# EAGLE board Forza R1 (EAGLE 9.6.2)
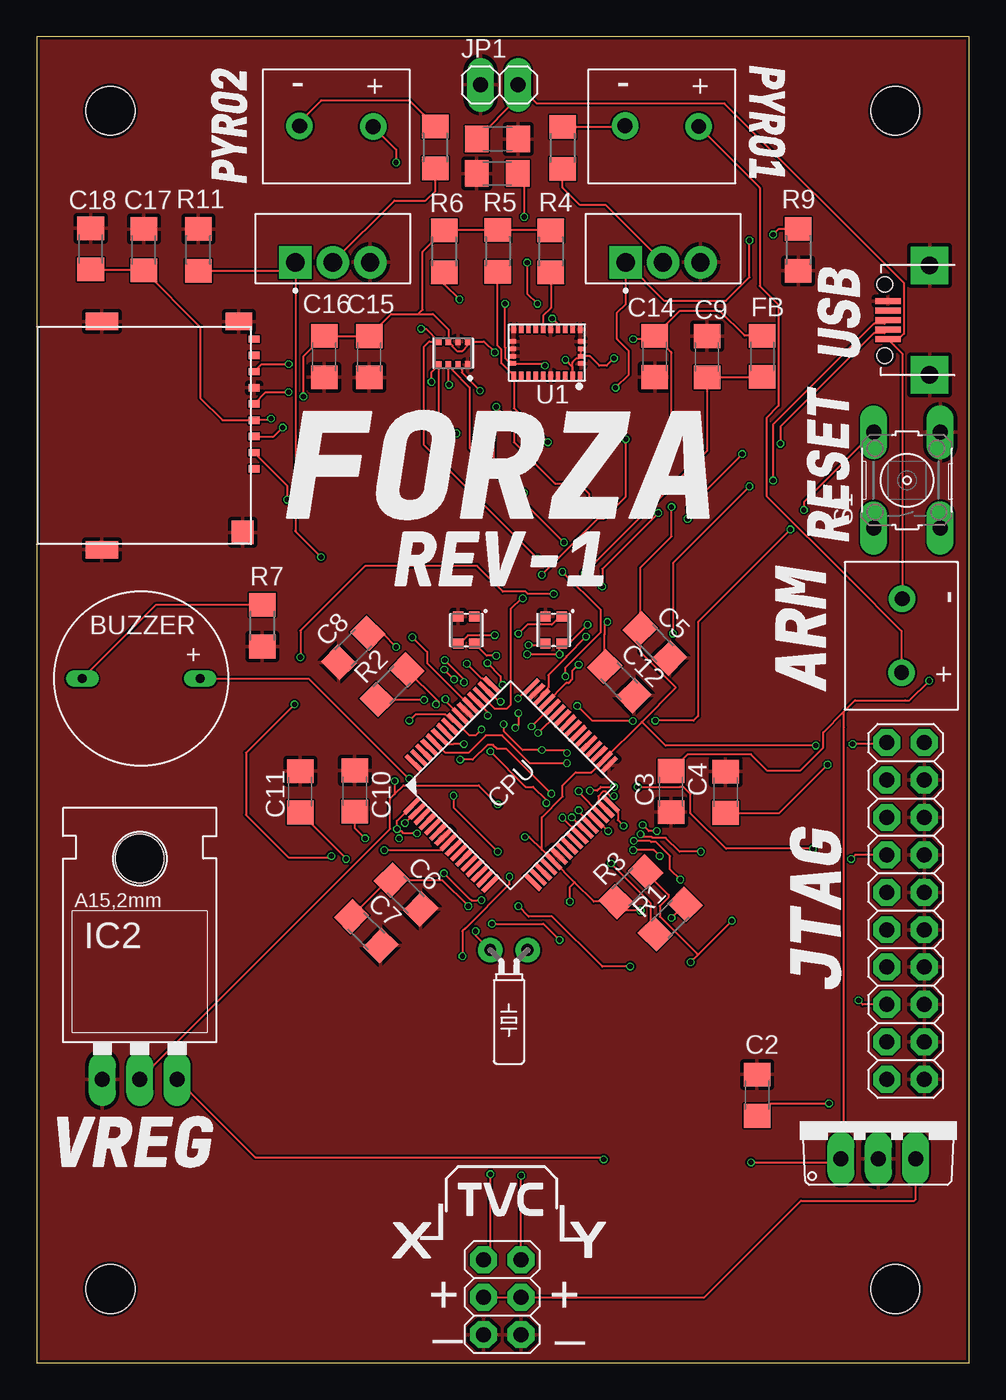
[diagram p0: board, top side]
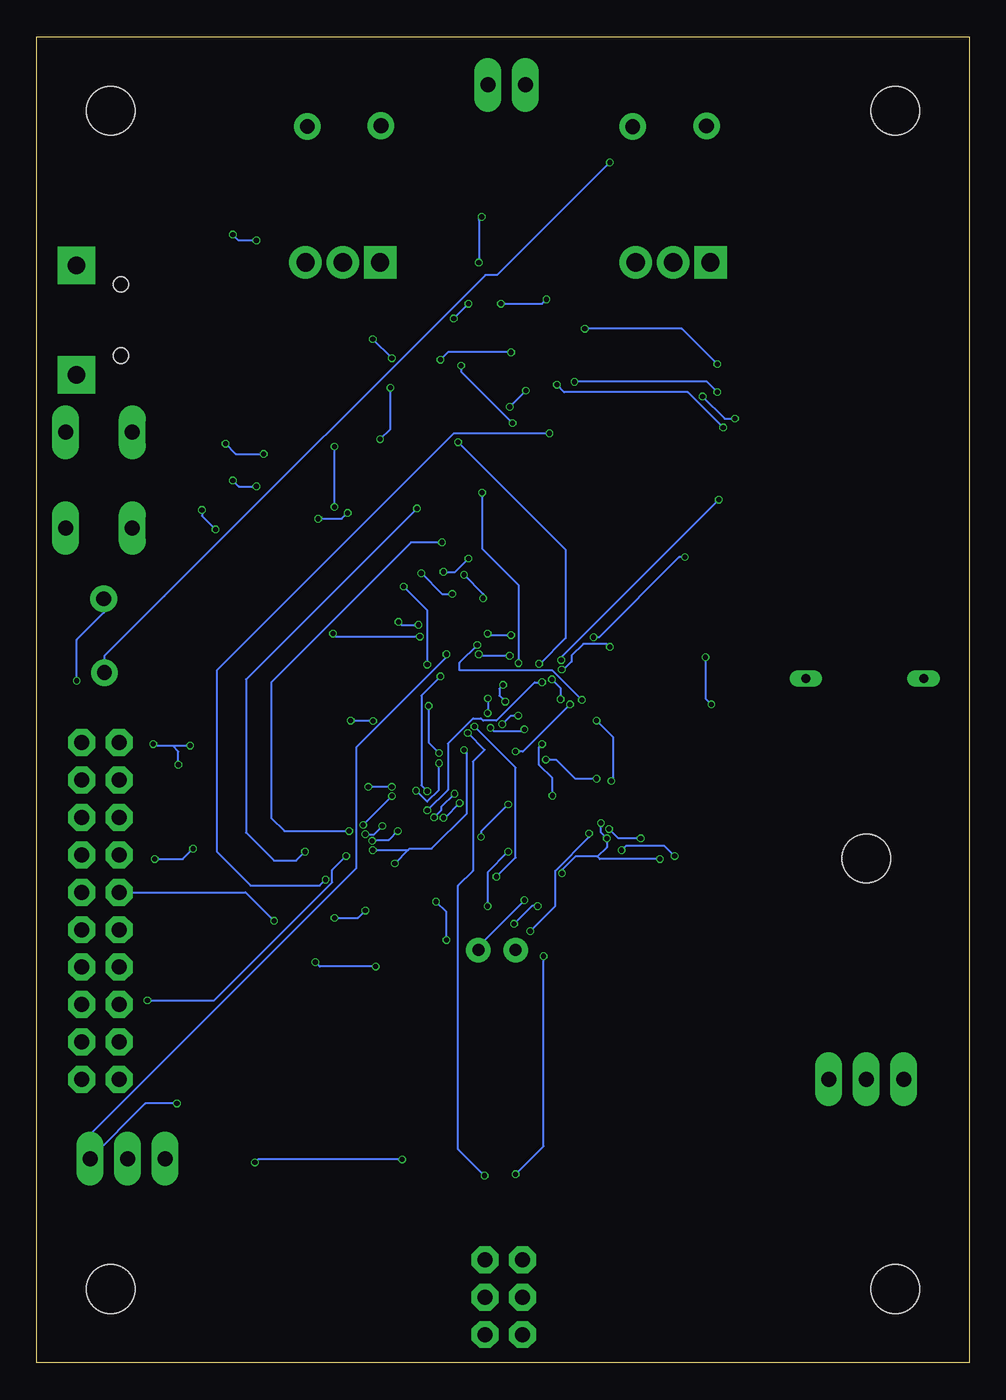
[diagram p1: board, bottom side, seen from below]

Size 63.31 x 90.03 mm. Coordinates in mm from the lower left corner, seen from the top.
Outline: 0,0 63.31,0 63.31,90.03 0,90.03 0,0
Copper layers (1*16): Top 0.035mm / dielectric 1.6mm / Bottom 0.035mm
Design rules "jlcpcb-2layers": minimum track width 5mil, minimum drill 0.3mm, track to track 5mil, track to pad 5mil, pad to pad 5mil, via to via 5mil, smd to smd 5mil, copper to edge 0.2mm, drill to drill 6mil, minimum pad ring 10mil, minimum via ring 3mil, stop-mask expansion 4mil, vias tented up to drill 0mil, thermal gap 10mil
Holes 3.3 mm at 5,5 58.3,5 5,85 58.3,85
tKeepout: area 0,80 to 10,90; area 53.3,80 to 63.3,90; area 0,0 to 10,10; area 53.3,0 to 63.3,10; area 0,80 to 10,90; area 53.3,80 to 63.3,90; area 53.3,0 to 63.3,10; area 0.1,0 to 10.1,10

## Footprints (pad centres in the part's own frame; a part is rotated, then mirrored left to right if it is on the bottom)
C1206 = smd 1.6 x 1.8: 1 -1.4,0; 2 1.4,0
WS2812-2020 = smd 0.7 x 0.7: DI -0.915,0.55; DO 0.915,-0.55; GND 0.915,0.55; VCC -0.915,-0.55
TO220V = drill 1.016 long: 1 -2.54,-2.54; 2 0,-2.54; 3 2.54,-2.54
TO220L1 = drill 1.016 long: 1 -2.54,-3.81; 2 0,-3.81; 3 2.54,-3.81 | hole 3.302: 0,11.176
1X02 = drill 1.016 long: 1 -1.27,0; 2 1.27,0
2X10 = drill 1.016 octagon: 1 -11.43,-1.27; 2 -11.43,1.27; 3 -8.89,-1.27; 4 -8.89,1.27; 5 -6.35,-1.27; 6 -6.35,1.27; 7 -3.81,-1.27; 8 -3.81,1.27; 9 -1.27,-1.27; 10 -1.27,1.27; 11 1.27,-1.27; 12 1.27,1.27; 13 3.81,-1.27; 14 3.81,1.27; 15 6.35,-1.27; 16 6.35,1.27; 17 8.89,-1.27; 18 8.89,1.27; 19 11.43,-1.27; 20 11.43,1.27
2X03 = drill 1.016 octagon: 1 -2.54,-1.27; 2 -2.54,1.27; 3 0,-1.27; 4 0,1.27; 5 2.54,-1.27; 6 2.54,1.27
TO254P1054X469X1930-3 = drill 1.23 pad 1.85 square: 1 -2.54,-0.94 | drill 1.23 pad 1.85: 2 0,-0.94; 3 2.54,-0.94
R1206 = smd 1.6 x 1.803: 1 -1.422,0; 2 1.422,0
B3F-10XX = drill 1.016 long: 1 -3.251,2.261; 2 3.251,2.261; 3 -3.251,-2.261; 4 3.251,-2.261
LGA28R50P4X10_380X520X100 = smd 0.3 x 0.525: 1 -2.25,1.562; 6 -2.25,-1.562; 7 -1.75,-1.562; 8 -1.25,-1.562; 9 -0.75,-1.562; 10 -0.25,-1.562; 11 0.25,-1.562; 12 0.75,-1.562; 13 1.25,-1.562; 14 1.75,-1.562; 15 2.25,-1.562; 20 2.25,1.562; 21 1.75,1.562; 22 1.25,1.562; 23 0.75,1.562; 24 0.25,1.562; 25 -0.25,1.562; 26 -0.75,1.562; 27 -1.25,1.562; 28 -1.75,1.562 | smd 0.425 x 0.3: 2 -2.312,0.75; 3 -2.312,0.25; 4 -2.312,-0.25; 5 -2.312,-0.75; 16 2.312,-0.75; 17 2.312,-0.25; 18 2.312,0.25; 19 2.312,0.75
XDCR_BMP280 = smd 0.5 x 0.35: 1 0.8,0.975; 2 0.8,0.325; 3 0.8,-0.325; 4 0.8,-0.975; 5 -0.8,-0.975; 6 -0.8,-0.325; 7 -0.8,0.325; 8 -0.8,0.975
SAMD21 = smd 0.3 x 1.5: GND 3.912,-10.687; GND3 6.412,0.693; PA08 1.412,-10.687; PA09 1.912,-10.687; PA10 2.412,-10.687; PA11 2.912,-10.687; PA12 7.412,-10.687; PA13 7.912,-10.687; PA14 8.412,-10.687; PA15 8.912,-10.687; PA27 7.912,0.693; PA28 6.912,0.693; PA30 4.912,0.693; PA31 4.412,0.693; PB00 2.912,0.693; PB01 2.412,0.693; PB02 1.912,0.693; PB03 1.412,0.693; PB10 4.412,-10.687; PB11 4.912,-10.687; PB12 5.412,-10.687; PB13 5.912,-10.687; PB14 6.412,-10.687; PB15 6.912,-10.687; PB22 8.912,0.693; PB23 8.412,0.693; PB30 3.912,0.693; PB31 3.412,0.693; RESET 7.412,0.693; VDDCORE 5.912,0.693; VDDIN 5.412,0.693; VDDIO 3.412,-10.687 | smd 1.5 x 0.3: GND1 10.673,-1.752; GND2 10.673,-8.752; GNDANA -0.687,-4.252; PA00 -0.687,-1.252; PA01 -0.687,-1.752; PA02 -0.687,-2.252; PA03 -0.687,-2.752; PA04 -0.687,-7.252; PA05 -0.687,-7.752; PA06 -0.687,-8.252; PA07 -0.687,-8.752; PA16 10.673,-7.752; PA17 10.673,-7.252; PA18 10.673,-6.752; PA19 10.673,-6.252; PA20 10.673,-4.752; PA21 10.673,-4.252; PA22 10.673,-3.752; PA23 10.673,-3.252; PA24 10.673,-2.752; PA25 10.673,-2.252; PB04 -0.687,-3.252; PB05 -0.687,-3.752; PB06 -0.687,-5.252; PB07 -0.687,-5.752; PB08 -0.687,-6.252; PB09 -0.687,-6.752; PB16 10.673,-5.752; PB17 10.673,-5.252; VDDANA -0.687,-4.752; VDDIO1 10.673,-1.252; VDDIO2 10.673,-8.252
BUZZER = drill 0.6 long: 3.3V 4,0; GND -4,0
MICRO-USB = smd 0.4 x 1.75: 1 -1.3,4.525; 2 -0.65,4.525; 3 0,4.525; 4 0.65,4.525; 5 1.3,4.525 | drill 1.2 pad 2.54 square: GND1 -3.725,1.7; GND2 3.725,1.7 | hole 1.05: -2.425,4.73; 2.425,4.73
SCREWTERMINAL = drill 1 pad 1.778: IN 3.8,2.5; OUT 3.85,7.5
MICROSD-PUSH-OUT = smd 0.5 x 0.75: 1 9.625,0.225; 2 8.525,0.225; 3 7.425,0.225; 4 6.325,0.225; 5 5.225,0.225; 6 4.125,0.225; 7 3.025,0.225; 8 1.925,0.225; CD 0.825,0.225 | smd 1.2 x 1.8: G1 -0.375,-0.8 | smd 1.2 x 2.2: G2 -0.375,-10.1; G4 15.125,-10.1 | smd 1.6 x 1.5: G3 13.95,-0.55
CRYSTAL-PTH-2X6-CYL = drill 0.813 pad 1.676: 1 -1.27,0; 2 1.27,0

## Placement (x,y rotation side)
C1  10uf  [C1206]  31.29,83.09 0 top
C2  1uf  [C1206]  48.91,18.16 90 top
C3  10uf  [C1206]  43.06,38.78 270 top
C4  10uf  [C1206]  46.77,38.73 90 top
C5  0.1uf  [C1206]  41.97,48.83 315 top
C6  0.1uf  [C1206]  25.07,31.78 315 top
C7  0.1uf  [C1206]  22.37,29.31 315 top
C8  0.1uf  [C1206]  21.49,48.54 45 top
C9  1uf  [C1206]  45.51,68.3 90 top
C10  15pf  [C1206]  21.59,38.81 270 top
C11  15pf  [C1206]  17.89,38.76 270 top
C12  1000uf  [C1206]  39.55,46.28 315 top
C13  0.1uf  [C1206]  31.27,80.74 0 top
C14  0.1uf  [C1206]  41.96,68.32 90 top
C15  100nF  [C1206]  22.57,68.3 270 top
C16  100nF  [C1206]  19.51,68.31 90 top
C17  0.1uf  [C1206]  7.26,75.57 90 top
C18  0.1uf  [C1206]  3.66,75.62 90 top
D1  WS2812_2020  [WS2812-2020]  35.09,49.75 90 top
D2  WS2812_2020  [WS2812-2020]  29.17,49.74 90 top
FB  30 Ohm  [C1206]  49.27,68.33 270 top
IC1  7805TV  [TO220V]  57.15,16.39 0 top
IC2  LD117AV  [TO220L1]  6.99,23.05 0 top
JP1  [1X02]  31.41,86.77 0 top
JP2  [2X10]  59,30.67 270 top
JP3  [2X03]  31.6,4.45 270 top
Q5  IRLZ44N  [TO254P1054X469X1930-3]  42.53,75.65 0 top
Q6  IRLZ44N  [TO254P1054X469X1930-3]  20.1,75.65 0 top
R1  10K  [R1206]  43.01,30.12 45 top
R2  470Ohm  [R1206]  24.12,46.04 45 top
R3  1K  [R1206]  40.34,32.32 45 top
R4  10K  [R1206]  34.91,75.46 90 top
R5  10K  [R1206]  31.31,75.48 90 top
R6  10K  [R1206]  27.66,75.46 90 top
R7  100Ohm  [R1206]  15.31,50.05 90 top
R8  1Ohm  [R1206]  35.71,82.49 90 top
R9  470Ohm  [R1206]  51.71,75.56 90 top
R10  1Ohm  [R1206]  27.06,82.52 90 top
R11  470Ohm  [R1206]  10.97,75.55 270 top
S1  [B3F-10XX]  59.09,59.92 90 top
U1  BNO055  [LGA28R50P4X10_380X520X100]  34.64,68.59 180 top
U2  BMP280  [XDCR_BMP280]  28.27,68.54 270 top
U$1  ATSAMD2164TQFP  [SAMD21]  25.11,39.21 45 top
U$2  BUZZER  [BUZZER]  7.09,46.45 0 top
U$3  MICRO-USB  [MICRO-USB]  62.33,70.79 90 top
U$4  SCREWTERMINAL  [SCREWTERMINAL]  37.44,87.79 270 top
U$5  SCREWTERMINAL  [SCREWTERMINAL]  15.34,87.78 270 top
U$7  MICROSD-PUSH-OUT  [MICROSD-PUSH-OUT]  14.52,70.32 270 top
U$8  SCREWTERMINAL  [SCREWTERMINAL]  62.57,54.36 180 top
Y1  32.768kHz  [CRYSTAL-PTH-2X6-CYL]  32.06,28.02 180 top

## Library data of the parts
C1-C18 FB = rcl; SPICEPREFIX: C
D1 D2 = SparkFun-LED; PROD_ID: DIO-15591
IC1 = linear
IC2 = v-reg
JP1-JP3 = pinhead
Q5 Q6 = IRLZ44N; AVAILABILITY: Not in stock; DESCRIPTION: N-Channel 55 V 47A (Tc) 3.8W (Ta), 110W (Tc) Surface Mount D2PAK; MF: Infineon / IR; MP: IRLZ44N; PACKAGE: TO-220-3 Infineon / IR; PRICE: None
R1-R11 = rcl; SPICEPREFIX: R
S1 = switch-omron; MPN: B3F-1000; OC_FARNELL: 176432; OC_NEWARK: 36M3542
U1 = BNO055; AVAILABILITY: In Stock; DESCRIPTION: BNO055 series Accelerometer, Gyroscope, Magnetometer, 3 Axis Sensor Evaluation Board; MF: Bosch; MP: BNO055; PACKAGE: LGA-28 Bosch; PRICE: None; PURCHASE-URL: https://pricing.snapeda.com/search/part/BNO055/?ref=eda
U2 = SBMP280; AVAILABILITY: Not in stock; DESCRIPTION: Pressure Sensor 4.35PSI ~ 15.95PSI (30kPa ~ 110kPa) Absolute - 16b 8-SMD; MF: Bosch; MP: BMP280; PACKAGE: SMD-8 Bosch Sensortec; PRICE: None
U$1 = Atmel ATSAMD21
U$2 = buzzer
U$3 = MicroUSB
U$4 U$5 U$8 = screw terminal
U$7 = cmsd2
Y1 = SparkFun-Clocks; PROD_ID: XTAL-10112

## Nets
3.3V: C4.1 C5.1 C6.1 C7.1 C14.2 C15.1 C16.2 C17.1 C18.1 FB.1 IC2.2 JP2.1 R1.2 R3.1 R4.2 R5.2 R6.2 U1.3 U1.4 U1.28 U2.6 U2.8 U$1.VDDIN U$1.VDDIO U$1.VDDIO1 U$1.VDDIO2 U$7.4
5V: C2.1 C12.1 D1.VCC D2.VCC IC1.3 JP3.3 JP3.4
7.4V: C1.1 C3.1 IC1.1 IC2.3 JP1.2 U$3.1 U$8.IN
7.4VPS: U$4.OUT U$5.OUT U$8.OUT
CS: U2.2 U$1.PA15
CSCARD: U$1.PB15 U$7.2
DM: U$1.PA24 U$3.2
DP: U$1.PA25 U$3.3
GND: C1.2 C2.2 C3.2 C4.2 C5.2 C6.2 C7.2 C8.1 C9.2 C10.1 C11.1 C12.2 C13.1 C14.1 C15.2 C16.1 C17.2 C18.2 D1.GND D2.GND IC1.2 IC2.1 JP1.1 JP2.4 JP2.6 JP2.8 JP2.10 JP2.12 JP2.14 JP2.16 JP2.18 JP2.20 JP3.5 JP3.6 Q5.3 Q6.3 R7.1 R9.1 R11.1 S1.4 U1.2 U1.5 U1.6 U1.10 U1.15 U1.16 U1.17 U1.18 U1.25 U2.1 U2.7 U$1.GND U$1.GND1 U$1.GND2 U$1.GND3 U$1.GNDANA U$3.5 U$3.GND1 U$3.GND2 U$7.6 U$7.G1 U$7.G2 U$7.G3 U$7.G4
LEDIN: R2.2 U$1.PB13
MISO: U2.5 U$1.PA13 U$7.7
MOSI: U2.3 U$1.PA14 U$7.3
N$1: C8.2 U$1.VDDCORE
N$5: C9.1 FB.2 U$1.VDDANA
N$7: D1.DO D2.DI
N$8: C11.2 U$1.PA01 Y1.1
N$9: C10.2 U$1.PA00 Y1.2
N$10: U$1.PB14 U$2.3.3V
N$11: D1.DI R2.1
N$12: R7.2 U$2.GND
N$13: R8.2 U$4.IN
N$14: Q5.2 R8.1
N$17: R10.2 U$5.IN
N$18: Q6.2 R10.1
N$19: C13.2 U1.9
N$25: R4.1 U1.11
PY1: Q5.1 R9.2 U$1.PA27
PY2: Q6.1 R11.2 U$1.PA28
RESET: JP2.15 R1.1 S1.2 U$1.RESET
SCK: U2.4 U$1.PA12 U$7.5
SCL: R6.1 U1.19 U$1.PB23
SDA: R5.1 U1.20 U$1.PB22
SWCLK: JP2.9 R3.2 U$1.PB30
SWDIO: JP2.7 U$1.PB31
TVCX: JP3.1 U$1.PA23
TVCY: JP3.2 U$1.PA22

## Tracks (layer width: path | path; a pad name or v marks a point on that pad's centre or on a via)
3.3V  (via drill 0.35)
  Top 0.127: 43.06,56.06 43.1,56.1 v43.1,58.1 | v43.1,62.2 43.1,68.58 43.06,68.62
  Top 0.152: 34.3,34.84 U$1.VDDIO 36.52,32.62 | 34.3,34.84 34.3,37.03 35.7,38.43 35.7,39.2 36.58,40.08 37.65,40.08 U$1.VDDIO2 41.09,43.52 | IC2.2 24,36.25 24,38.3 24.3,38.6 | 24.3,38.6 24.9,39.2 30,39.2 v31.3,37.9 | v31.1,68.6 30.36,69.34 U2.8 29.25,69.05 28.9,68.7 28.52,68.7 28.22,69.01 28.22,69.07 U2.6 27.95,70.16 26.9,71.2 25.9,71.2 | v35.9,68.1 36.39,67.61 U1.28 36.39,67.93 36.66,68.19 36.81,68.19 U1.3 | U1.3 U1.4 | C14.2 41.74,69.5 v40.5,69.5 | v39.2,68.2 38.7,67.7 38.2,67.7 37.56,68.34 U1.3 | v18.1,65.6 18.1,68.3 C16.2 C15.1 24.07,71.2 25.9,71.2 | v15.9,64.1 15.79,63.99 U$7.4 12.61,63.99 11.1,65.5 11.1,70.33 C17.1 7.21,74.22 C18.1 | R5.2 31.29,76.88 | 31.29,76.88 R6.2 26.2,75.42 26.2,71.5 25.9,71.2 | R4.2 31.29,76.88 | 41.09,43.52 43.4,45.83 40.98,48.25 C5.1 40.98,53.98 43.06,56.06 | JP2.1 57.63,42 v55.4,42 | v52.9,41.9 42.7,41.9 41.09,43.52 | C4.1 50.43,37.33 v53.7,40.6 | 36.52,32.62 37.82,31.32 R3.1 39.95,30.7 v41,30.7 | R1.2 v43.09,30.2 v43.1,30.2 | C7.1 23.85,32.77 C6.1 27.52,32.77 v29.3,31 | v30.9,29.8 34.4,29.8 v35.5,28.7 | v36.2,31.3 36.2,32.3 36.52,32.62 | 43.06,68.62 C14.2 | FB.1 48.07,69.73 46.4,71.4 43.64,71.4 C14.2 | v24.3,39.5 24.3,38.6 | v30.2,43 29.8,42.6 29.37,42.6 U$1.VDDIN 28.24,43.52 27.75,44.01 25.71,44.01 v25.3,43.6 | v33.15,35.7 33.44,35.7 34.3,34.84 | v32.7,44.11 32.7,43.3 v32.5,43.1 | U$1.VDDIO1 33.45,45.87 v32.68,45.1
  Bottom 0.127: v43.1,58.1 v43.1,62.2
  Bottom 0.152: v31.1,68.6 35.4,68.6 v35.9,68.1 | v40.5,69.5 v39.2,68.2 | v18.1,65.6 16.6,64.1 v15.9,64.1 | v55.4,42 55.3,41.9 54.1,41.9 | 54.1,41.9 v52.9,41.9 | v53.7,40.6 53.7,41.5 54.1,41.9 | v43.1,30.2 41.5,30.2 v41,30.7 | v29.3,31 29.7,31 v30.9,29.8 | v35.5,28.7 35.5,30.6 v36.2,31.3 | v24.3,39.5 24.2,39.6 24.2,42.5 v25.3,43.6 | v30.2,43 30.3,42.9 32.3,42.9 v32.5,43.1 | v31.3,37.9 33.15,36.05 v33.15,35.7 | v32.68,45.1 32.68,44.13 v32.7,44.11
5V  (via drill 0.35)
  Top 0.152: JP3.3 JP3.4 45.35,4.45 51.9,11 59.6,11 59.69,11.09 IC1.3 | C2.1 49.75,17.6 v53.8,17.6 | v33.3,48.1 v35.5,48.1 35.5,48.69 D1.VCC 36.13,48.83 v37.4,50.1 | v31.2,48 30.54,48 D2.VCC | C12.1 38.55,49.46 38.58,49.48 38.58,50.12 v38.75,50.3
  Bottom 0.152: v53.8,17.6 55.94,17.6 IC1.3 59.69,15.51 41.6,33.6 41.6,41.8 35.5,47.9 v35.5,48.1 | v33.3,48.1 33.2,48 v31.2,48 | v38.75,50.3 38.55,50.1 v37.4,50.1
7.4V  (via drill 0.35)
  Top 0.127: 58.97,44.97 55.56,44.97 54.81,44.21 | 54.81,44.21 53.4,42.8 53.4,41.76 | 54.81,43.13 54.81,44.21 | U$8.IN 58.77,68.53 58.2,69.1 | v38.5,13.8 38.37,13.94 14.84,13.94 IC2.3 | v48.5,13.6 54.36,13.6 IC1.1
  Top 0.152: 54.81,43.13 54.81,14.05 IC1.1 | C1.1 32.68,85.88 JP1.2 33.95,85.5 46.7,85.5 58.88,73.32 58.88,69.86 58.52,69.49 U$3.1 58.2,69.1 | 53.4,41.76 51.82,40.18 49.62,40.18 48.5,41.3 44.19,41.3 C3.1 | 58.97,44.97 59.27,44.97 v60.6,46.3
  Bottom 0.127: v38.5,13.8 48.3,13.8 v48.5,13.6
  Bottom 0.152: v60.6,46.3 60.6,49.1 58.77,50.93 U$8.IN
7.4VPS  (via drill 0.35)
  Top 0.127: 55.2,53.2 58.72,49.68 U$8.OUT
  Top 0.152: U$5.OUT 24.4,82.37 v24.4,81.5 | U$4.OUT 49.1,79.78 49.1,73.1 50.37,71.83 50.37,64.97 49.55,64.15 49.55,58.85 55.2,53.2
  Bottom 0.127: 54.66,52.04 58.72,47.98 U$8.OUT
  Bottom 0.152: v24.4,81.5 32.05,73.85 32.85,73.85 54.66,52.04
CS  (via drill 0.35)
  Top 0.127: 28.87,67.41 28.87,67.23 v30.1,66 | v31.2,64.9 32.4,63.7 32.4,62.5 35.2,59.7 36.8,59.7 37.5,59 37.5,58.77
  Top 0.152: U2.2 28.87,67.47 28.87,67.41 | 37.5,58.77 v37.5,58 | v45.1,34.7 43.64,34.7 42.7,35.65 41.81,35.65 41.74,35.71 41.17,35.71 v41,35.88 | v39.84,36.45 39.45,36.84 39.45,37.47 U$1.PA15
  Bottom 0.127: v30.1,66 v31.2,64.9
  Bottom 0.152: v37.5,58 49.1,46.4 49.1,36 47.2,34.1 45.7,34.1 v45.1,34.7 | v41,35.88 40.41,35.88 v39.84,36.45
CSCARD  (via drill 0.35)
  Top 0.152: U$7.2 17,59.54 v17,58.6 | v27.7,47.7 29,46.4 v29,46.2 | U$1.PB15 37.55,36.65 36.8,37.4 v36.8,37.5
  Bottom 0.152: v17,58.6 27.7,47.9 v27.7,47.7 | v29,46.2 29.5,46.2 32.1,43.6 33,43.6 33.15,43.75 33.69,43.75 35.4,42.04 35.4,38.9 v36.8,37.5
DM  (via drill 0.35)
  Top 0.152: U$3.2 57.56,69.89 56.85,69.89 50.5,63.55 v50.5,62.4 | v47.9,61.7 44.2,58 v44.2,57.3 | v42.2,57.7 38.4,53.9 v38.4,52.7 | v36.8,47.4 36.35,46.95 36.35,46.41 36.09,46.15 35.94,46.15 U$1.PA24
  Bottom 0.152: v50.5,62.4 49.8,61.7 v47.9,61.7 | v44.2,57.3 42.6,57.3 v42.2,57.7 | v38.4,52.7 36.8,51.1 v36.8,47.4
DP  (via drill 0.35)
  Top 0.152: U$3.3 57.56,70.54 56.85,70.54 50,63.7 v50,59.9 | v48.4,59.5 43.2,54.3 v43.2,49.5 | v37.3,49.3 35.95,47.95 35.95,47.91 34.73,46.69 34.73,45.85 34.25,45.37 U$1.PA25
  Bottom 0.152: v50,59.9 49.6,59.5 v48.4,59.5 | v43.2,49.5 43,49.3 v37.3,49.3
GND
  pour Top: -2.8,90.5 -2.8,-2.4 67.6,-2.4 67.6,91.2 -2.1,91.2
LEDIN  (via drill 0.35)
  Top 0.152: R2.2 27.28,44.88 v27.1,44.7 | v30.8,41.5 33.2,39.1 33.7,39.1 34.6,38.2 v34.6,38 | v35.7,37 36.84,35.86 U$1.PB13
  Bottom 0.152: v27.1,44.7 30.3,41.5 v30.8,41.5 | v35.7,37 35.6,37 v34.6,38
MISO  (via drill 0.35)
  Top 0.152: U$7.7 15.25,67.8 v17.11,67.8 | v26.1,70.2 26.43,70.2 U2.5 26.64,69.34 26.3,69 26.3,62.3 v34,54.6 | U$1.PA13 36.8,38.7 v36.8,38.8 | v35.9,46.6 35.9,47.2 38.3,49.6 38.3,51.1 v35.7,53.7
  Bottom 0.152: v17.11,67.8 19.51,70.2 v26.1,70.2 | v36.8,38.8 37.2,39.2 37.2,45.3 v35.9,46.6 | v35.7,53.7 34.9,53.7 v34,54.6
MOSI  (via drill 0.35)
  Top 0.152: U$7.3 16.09,62.9 v16.7,63.5 | v28,66.4 27.95,66.45 U2.3 28.22,67.47 28.22,67.41 29.4,66.22 29.4,62.1 v35.8,55.7 | v42.1,36.1 41.56,36.1 v41.15,36.51 | v39.19,38.47 38.95,38.47 38.63,38.79 38.46,38.79 38.13,38.46 38.13,38.08 U$1.PA14
  Bottom 0.152: v16.7,63.5 19.1,65.9 27.5,65.9 v28,66.4 | v35.8,55.7 37.9,55.7 47.4,46.2 47.4,37 46.5,36.1 v42.1,36.1 | v41.15,36.51 v39.19,38.46 v39.19,38.47
N$1  (via drill 0.35)
  Top 0.152: C8.2 23.47,49.53 v24.4,48.6 | v27.67,47.07 v28.34,46.4 | v27.75,45.05 27.75,44.93 U$1.VDDCORE
  Bottom 0.152: v24.4,48.6 24.6,48.8 26.2,48.8 27,48 27,47.6 27.53,47.07 v27.67,47.07 | v28.34,46.4 27.75,45.8 v27.75,45.05
N$5  (via drill 0.35)
  Top 0.152: FB.2 49.24,66.9 C9.1 45.51,61.91 v37.2,53.6 | v35.1,52.2 33.34,52.2 33.19,52.35 31.65,52.35 29.9,54.1 22.3,54.1 17.9,49.7 v17.9,47.9 | v17.5,44.7 14.2,41.4 14.2,37.2 17.1,34.3 19.9,34.3 v20,34.4 | v23.6,34.8 27.42,34.8 U$1.VDDANA
  Bottom 0.152: v37.2,53.6 35.8,52.2 v35.1,52.2 | v17.9,47.9 17.9,45.1 v17.5,44.7 | v20,34.4 20.7,35.1 23.3,35.1 v23.6,34.8
N$7  (via drill 0.35)
  Top 0.152: D1.DO 35.53,50.66 34.98,50.11 33.31,50.11 v32.7,49.5 | D2.DI 28.73,48.83 29.28,49.38 31.08,49.38 v31.1,49.4
  Bottom 0.152: v32.7,49.5 32.6,49.4 v31.1,49.4
N$8  (via drill 0.35)
  Top 0.127: v27.65,33.23 29.43,31.44 29.48,31.44 29.52,31.4 v30.2,31.4
  Top 0.152: C11.2 21,34.25 v21,34.2 | U$1.PA01 25.84,37.48 v25,36.64
  Bottom 0.127: v24.6,35.6 24.6,35 25.24,34.36 26.74,34.36 27.65,33.45 v27.65,33.23 | v30.2,31.4 33.33,28.27 Y1.1
  Bottom 0.152: v21,34.2 25.08,34.2 25.24,34.36 | v24.6,35.6 25,36 v25,36.64
N$9  (via drill 0.35)
  Top 0.127: Y1.2 29.8,29.01 v29.8,29.3
  Top 0.152: C10.2 21.59,36.31 v22.3,35.6 | U$1.PA00 24.45,36.78 v24.45,36.23 24.63,36.05 24.79,36.05 24.91,35.94 v25.81,35.94
  Bottom 0.127: v29.8,29.3 28.1,31 28.1,33.4 25.81,35.69 v25.81,35.94
  Bottom 0.152: v22.3,35.6 23.82,35.6 v24.45,36.23
N$10  (via drill 0.35)
  Top 0.152: U$2.3.3V 18.45,46.45 25.3,39.6 v25.3,39.65 | v34.95,38.63 31.88,41.7 31.24,41.7 30.99,41.95 30.61,41.95 29.6,40.95 v28.75,40.95 | v36.33,37.03 37.17,36.18 U$1.PB14
  Bottom 0.152: v34.95,38.63 35.85,37.73 35.85,37.51 v36.33,37.03 | v28.75,40.95 28.05,40.95 26.75,39.65 v25.3,39.65
N$11  (via drill 0.35)
  Top 0.152: R2.1 26.27,45.03 v26.3,45 | v33.4,48.73 34.44,48.73 D1.DI
  Bottom 0.152: v26.3,45 28.3,47 34.6,47 34.6,47.53 v33.4,48.73
N$12
  Top 0.152: U$2.GND 8.11,51.47 R7.2
N$13
  Top 0.152: R8.2 39.86,83.91 U$4.IN
N$14
  Top 0.152: Q5.2 38.64,78.6 36.9,78.6 35.71,79.79 R8.1
N$17
  Top 0.152: R10.2 25.3,85.7 19.3,85.7 17.84,84.24 U$5.IN
N$18
  Top 0.152: Q6.2 24.29,78.9 26.4,78.9 27.06,79.56 R10.1
N$19  (via drill 0.35)
  Top 0.152: C13.2 33.1,80.31 v33.1,77.8 | v33.3,74.7 33.3,72.6 v34,71.9 | v35,70.9 35.39,70.51 U1.9
  Bottom 0.152: v33.1,77.8 33.3,77.6 v33.3,74.7 | v34,71.9 v35,70.9
N$25
  Top 0.152: R4.1 34.91,71.61 34.39,71.09 U1.11
PY1  (via drill 0.35)
  Top 0.127: v39.3,66.2 40.2,67.1 40.2,68.7 39.4,69.5 39.4,71.3 39.99,71.89 Q5.1 | 32.2,51.2 32.9,51.9 v33,51.9 | v34.3,53.5 38.1,57.3 38.5,57.3 40,58.8 v40,62.7
  Top 0.152: Q5.1 42.6,72.1 46.8,72.1 48.4,73.7 v48.4,76.2 | v50,76.6 50.38,76.98 R9.2 | U$1.PA27 31.1,44.4 31.9,44.4 32.2,44.7 32.2,51.2
  Bottom 0.127: v40,62.7 39.3,63.4 v39.3,66.2 | v33,51.9 33,52.2 v34.3,53.5
  Bottom 0.152: v48.4,76.2 49.6,76.2 v50,76.6
PY2  (via drill 0.35)
  Top 0.127: 17.56,56.53 17.56,56.44 v19.3,54.7 | v25.5,49.25 26.5,48.25 26.5,47.5 29.41,44.59 U$1.PA28
  Top 0.152: R11.2 16.98,74.13 Q6.1 17.56,56.53
  Bottom 0.127: v19.3,54.7 19.7,54.7 25.15,49.25 v25.5,49.25
RESET  (via drill 0.35)
  Top 0.152: JP2.15 56.08,24.32 v55.8,24.6 | v52.1,57.9 52.1,58.44 S1.2 | v51.18,56.58 44.9,50.3 44.9,43.9 44.6,43.6 v42,43.6 | v40.47,43.57 37.73,43.57 v36.7,44.6 | v42.3,34.4 41.9,34.8 v40.5,34.8 | v39,33.9 41.7,31.2 41.7,29.42 R1.1 | v36,41.4 35.8,41.6 v34.3,41.6 32.99,41.6 31.7,42.89 v31.7,43.35 | U$1.RESET 30.62,44.18 v30.62,43.94
  Bottom 0.152: v42.3,34.4 43.25,33.45 43.25,32.61 51.26,24.6 v55.8,24.6 | v40.5,34.8 38.1,34.8 | v34.3,41.6 34.1,41.4 34.1,37.3 36.5,34.9 38,34.9 38.1,34.8 | v52.1,57.9 52.1,57.5 v51.18,56.58 | v42,43.6 40.5,43.6 v40.47,43.57 | v36.7,44.6 36.7,42.1 v36,41.4 | v39,33.9 38.1,34.8 | v31.7,43.35 31.12,43.94 v30.62,43.94
SCK  (via drill 0.35)
  Top 0.152: U$7.5 15.55,65.9 v17.1,65.9 | v26.8,66.6 26.8,67.25 U2.4 27.3,64.31 v28.5,63.1 | v43.7,32.8 43,33.5 43,34.4 42.05,35.35 41.71,35.35 41.63,35.43 v40.54,35.43 | v38.8,36.1 38.01,36.89 U$1.PA12
  Bottom 0.152: v17.1,65.9 17.8,66.6 v26.8,66.6 | v28.5,63.1 35,63.1 51.1,47 51.1,34.7 48.8,32.4 44.1,32.4 v43.7,32.8 | v40.54,35.43 40.47,35.5 39.4,35.5 v38.8,36.1
SCL  (via drill 0.35)
  Top 0.152: v31.8,71.9 31.8,68.94 31.83,68.9 31.83,68.18 32.03,67.99 32.18,67.99 U1.19 34.36,67.84 v34.5,67.7 | v28.7,72.2 27.66,73.24 R6.1 | v31,63.8 31,61.14 v33.07,59.07 | v30.6,47.5 31.5,46.6 31.5,46.1 31.58,46.02 v31.64,46.02 | U$1.PB23 30.64,45.65 31.4,44.88 v31.5,44.88
  Bottom 0.152: v31.8,71.9 29,71.9 v28.7,72.2 | v34.5,67.7 34.5,67.3 v31,63.8 | v33.07,59.07 33.07,55.27 30.6,52.8 v30.6,47.5 | v31.64,46.02 31.9,45.77 31.9,45.3 31.5,44.9 v31.5,44.88
SDA  (via drill 0.35)
  Top 0.152: R5.1 31.3,74.05 31.3,69.04 31.55,68.79 31.55,67.86 U1.20 32.39,64.81 v34.7,62.5 | v29.2,47.45 30.17,46.48 30.23,46.48 30.71,46 U$1.PB22
  Bottom 0.152: v34.7,62.5 27.4,55.2 27.4,49.2 29.15,47.45 v29.2,47.45
SWCLK  (via drill 0.35)
  Top 0.152: v28.3,38.5 28.3,37.7 v31.3,34.7 | v29,42 28.27,42 28.25,41.98 27.87,41.98 U$1.PB30 | v47.2,30 44.85,27.65 | 44.85,27.65 v44.4,27.2 | R3.2 42.9,31.77 42.9,31.6 42.3,31 42.3,30.3 44.85,27.75 44.85,27.65 | v32.7,31 33.4,30.3 35,30.3 38.4,26.9 v40.3,26.9
  Bottom 0.152: JP2.9 49.14,31.94 v47.2,30 | v28.3,38.5 28.3,39.7 29.2,40.6 29.2,41.8 v29,42 | v40.3,26.9 44.1,26.9 v44.4,27.2 | v31.3,34.7 32.7,33.3 v32.7,31
SWDIO  (via drill 0.35)
  Top 0.127: 38.3,39.1 v39.2,39.1 | v40.8,39.1 43.7,39.1
  Top 0.152: JP2.7 55.58,34.48 v55.3,34.2 | 38.3,39.1 38.04,38.84 v37.56,38.84 | v36,40.7 33.5,40.7 31.6,42.6 30.5,42.6 29.3,41.4 27.74,41.4 U$1.PB31 | 43.7,39.1 43.9,39.1 44.4,38.6 44.4,37.3 46.8,34.9 v52.7,34.9
  Bottom 0.127: v39.2,39.1 v40.8,39.1
  Bottom 0.152: v55.3,34.2 53.4,34.2 v52.7,34.9 | v37.56,38.84 36.81,38.09 36,38.9 v36,40.7
TVCX  (via drill 0.35)
  Top 0.127: 29.1,29.5 28.9,29.3 v28.9,27.6
  Top 0.152: JP3.1 30.8,7.46 v30.8,12.8 | v33.6,43.2 34.85,44.45 U$1.PA23 | 29.1,29.5 32.1,32.5 v32.1,33
  Bottom 0.152: v33.6,43.2 30.8,40.4 30.8,34.3 v32.1,33 | v30.8,12.8 28.9,14.7 v28.9,27.6
TVCY  (via drill 0.35)
  Top 0.152: JP3.2 32.87,12.67 v32.9,12.7 | v34.05,42.76 35.31,44.02 U$1.PA22
  Bottom 0.152: v34.05,42.76 32.9,41.61 33.7,40.81 33.7,33.4 34.7,32.4 34.7,14.5 v32.9,12.7

## Text on the board
tPlace: L | L | + | + | _ | _